# Altium PCB BreakoutPcb.PcbDoc
Units mm, origin at the board's own origin, x right, y up, seen from the top; angles counter-clockwise.
Board outline 40.78 x 37.52 mm, 2 copper layers (Top Layer, Bottom Layer); 11 components, 15 nets, 60 pads, 6 vias.
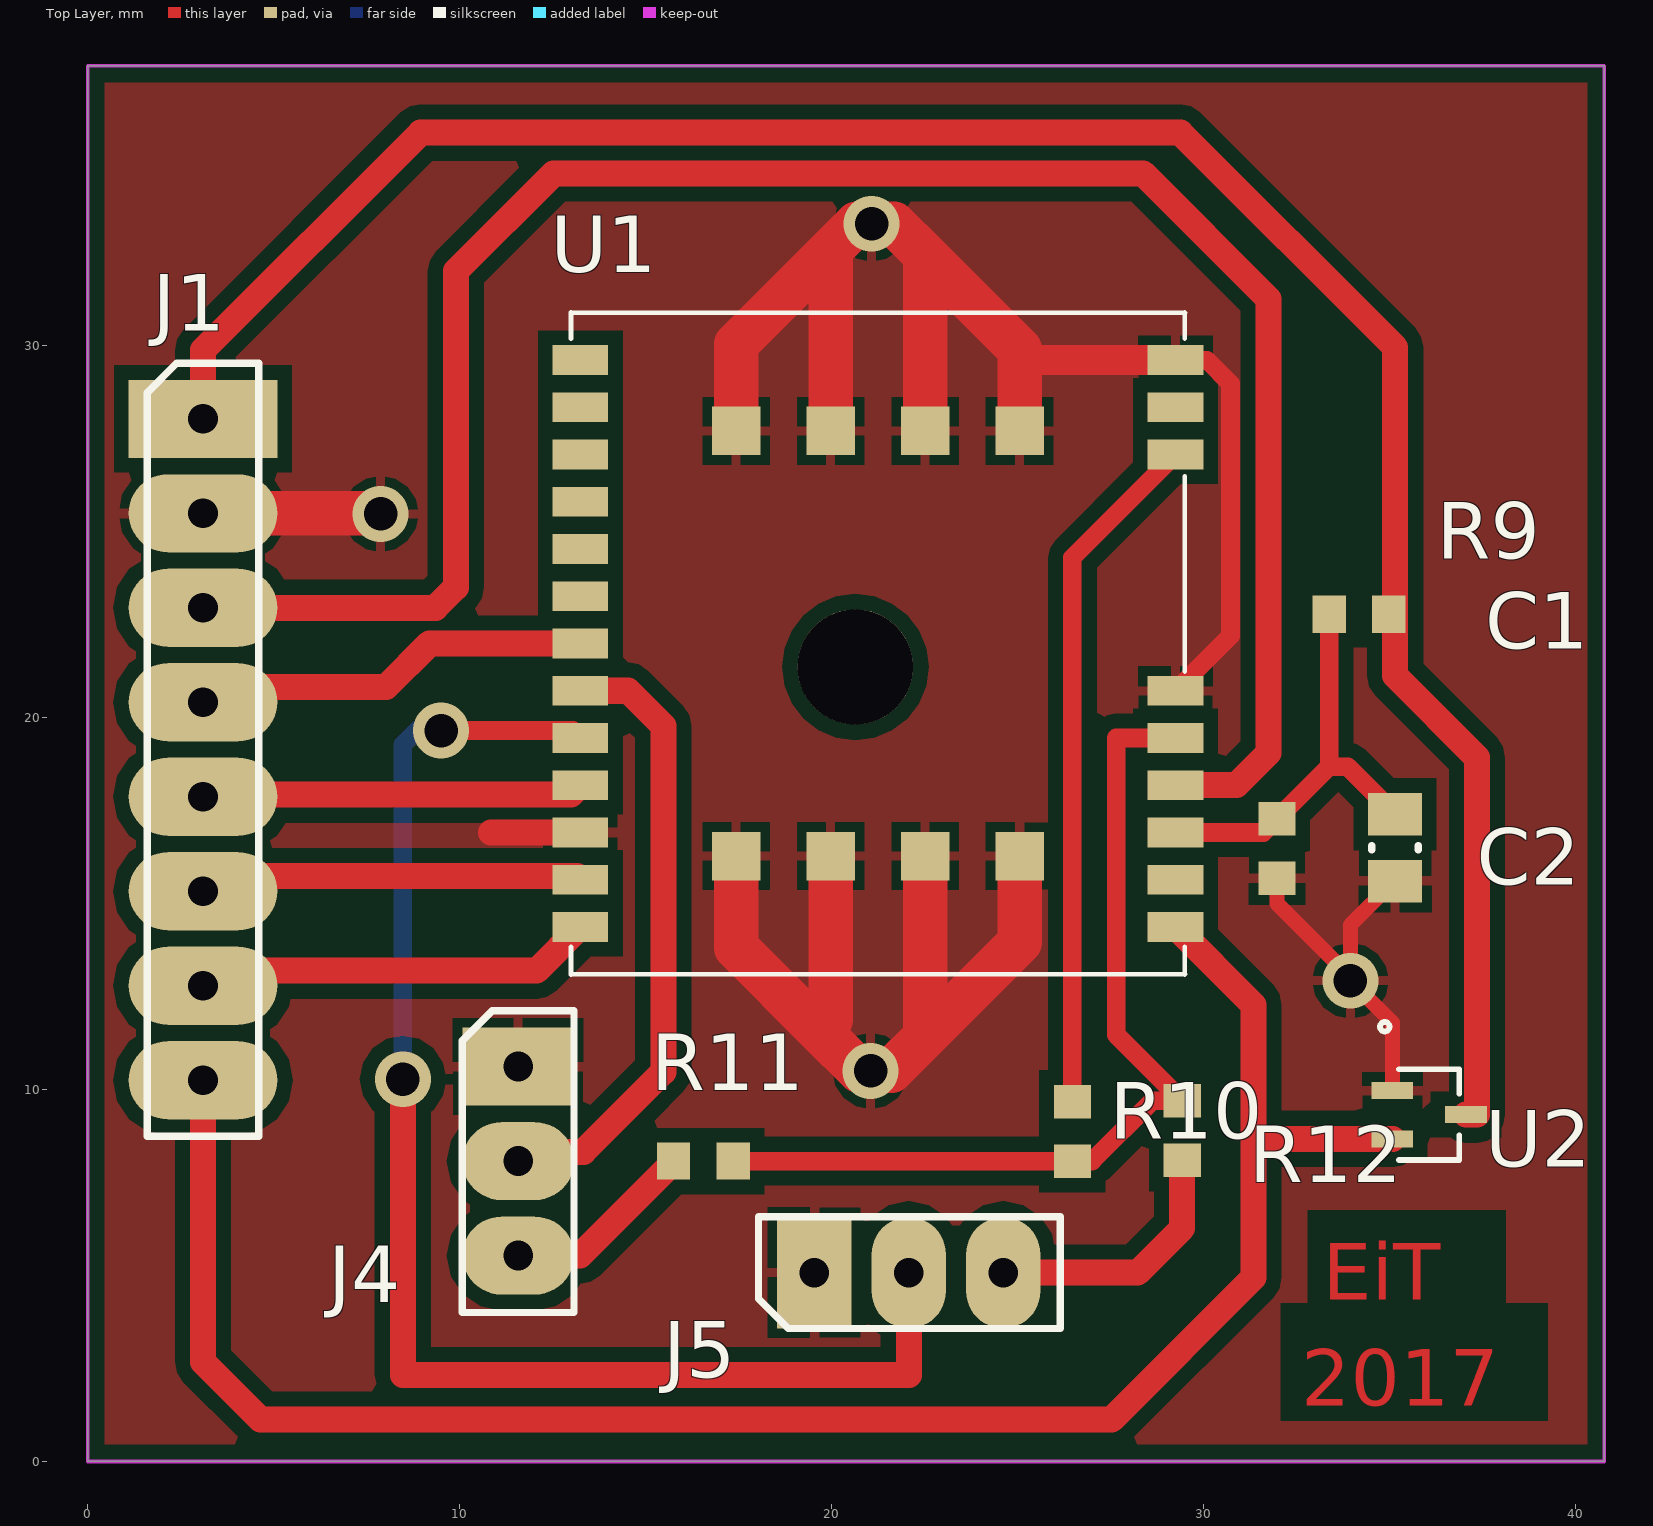
[diagram p0: Top Layer view]
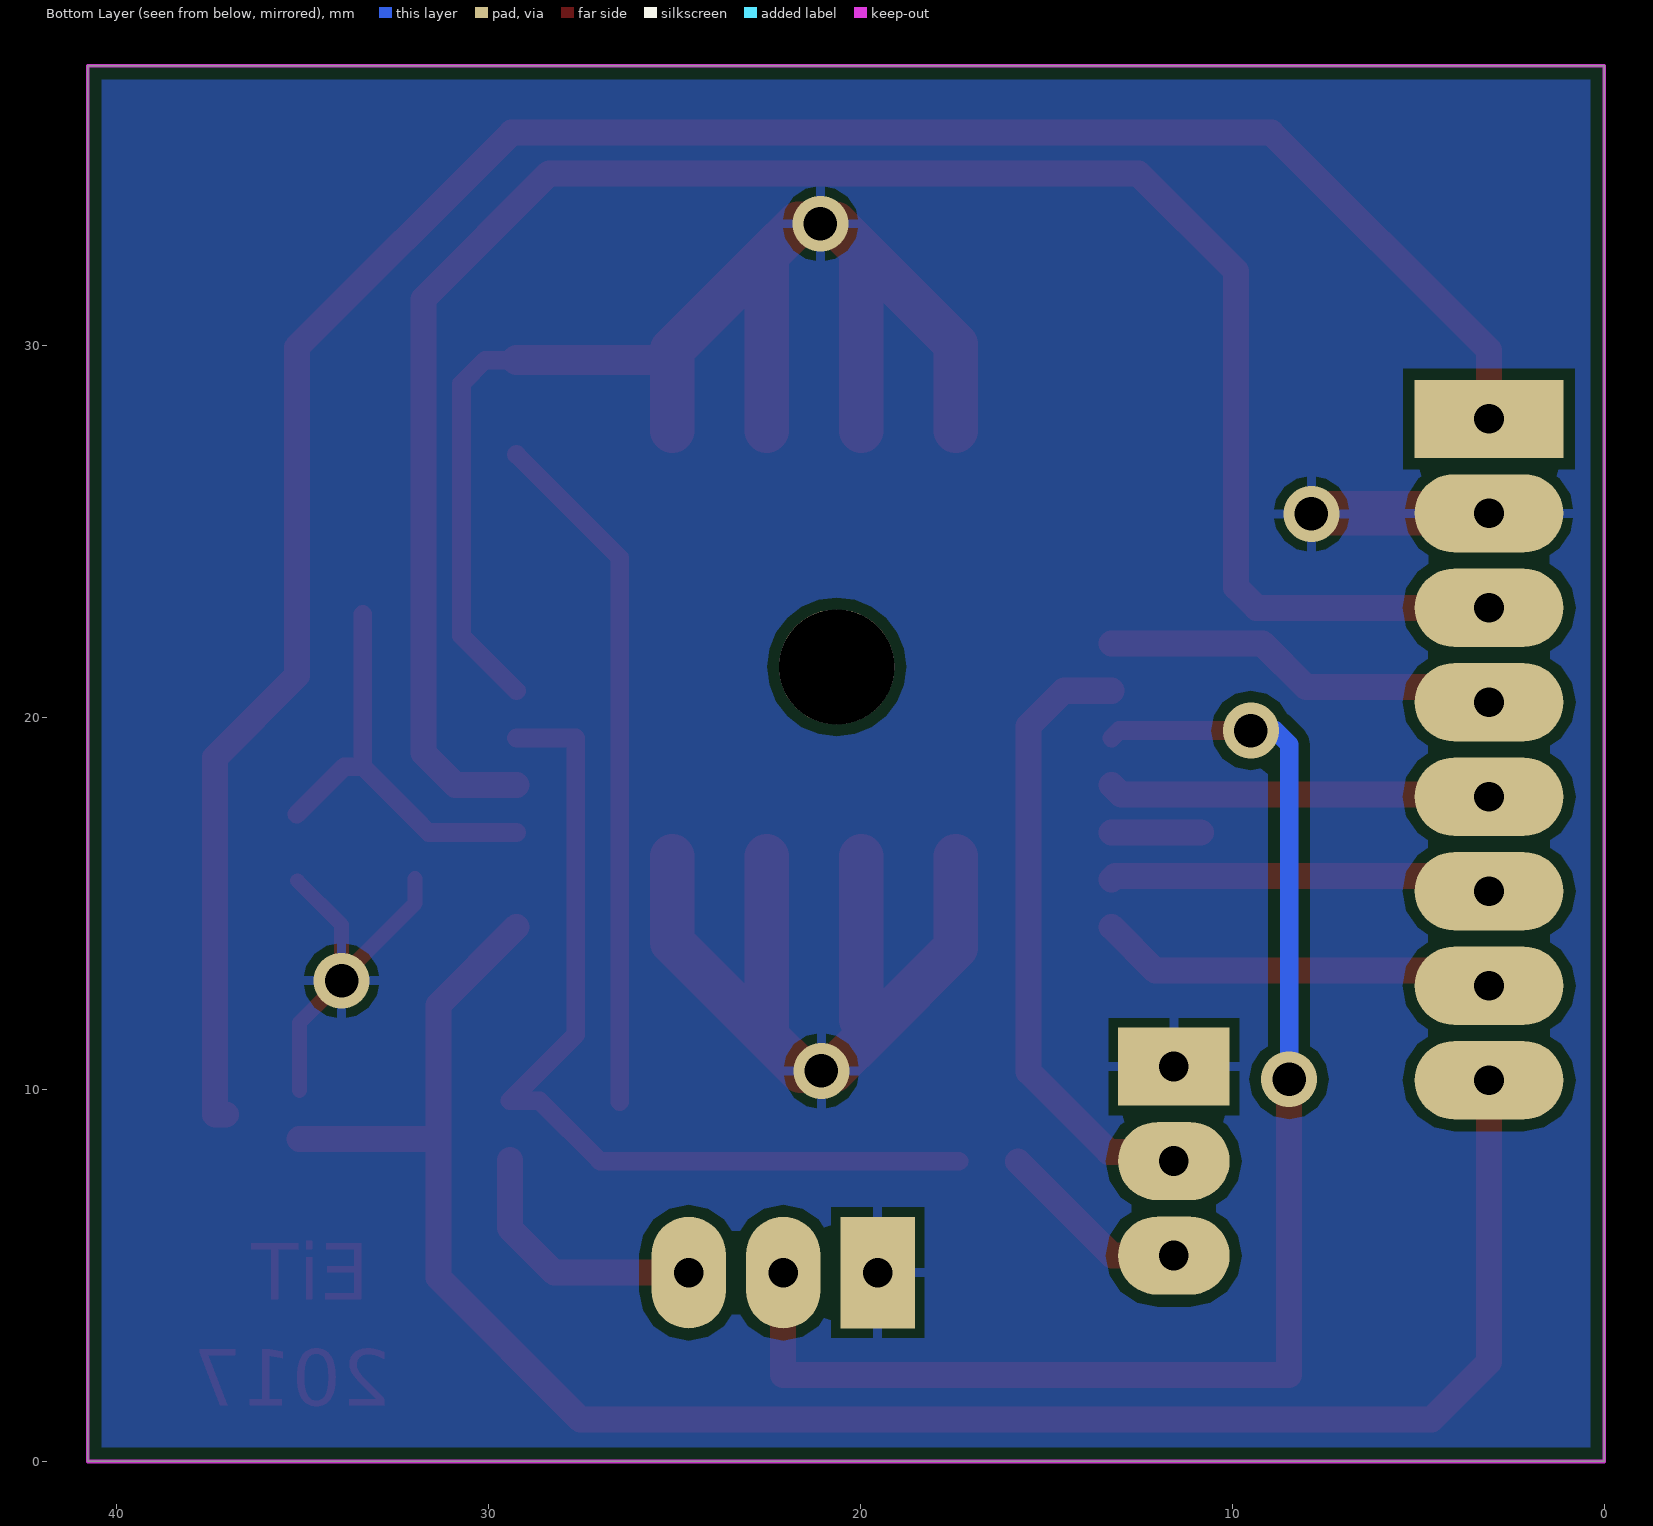
[diagram p1: Bottom Layer view, seen from below]

## Layer stack, top to bottom
Top Solder: solder mask 0.0102, Solder Resist, Dk 3.5
Top Layer: signal copper 0.0356
Dielectric 1: dielectric 0.32, FR-4, Dk 4.8
Bottom Layer: signal copper 0.0356
Bottom Solder: solder mask 0.0102, Solder Resist, Dk 3.5

## Board outline
0,37.275 0,37.525 40.775,37.525 40.775,0 0,0

## Design rules (kind name [scope] priority, off if disabled: settings)
Clearance Clearance_2 [InNamedPolygon('Bottom Layer-GND')] p1: gap=0.3
Clearance Clearance_1 [InNamedPolygon('Bottom Layer-GND')] p2: gap=0.4
Clearance Clearance_Text [IsText] p3: gap=0
Clearance Clearance_Poly [All vs InPolygon] p4: gap=0.4
Clearance [All] p5: gap=0.25
HoleSize [All] p1: absolutevalues=TRUE maxlimit=5 minlimit=0.025 maxpercent=80.000 minpercent=20.000
MinimumSolderMaskSliver [All] p1: minsoldermaskwidth=0.15
PolygonConnect [All] p1: connectstyle=Relief reliefconductorwidth=0.254 reliefentries=4 polygonreliefangle="90 Angle" airgapwidth=0.254
RoutingVias [All] p1: holewidth=0.711 width=1.27 viastyle="Through Hole" minholewidth=0.711 minwidth=1.27 maxholewidth=0.711 maxwidth=1.27
SilkToSilkClearance [All] p1: silktosilkclearance=0.01
SilkToSolderMaskClearance [IsPad] p1: minsilkscreentomaskgap=0.01 clearancetoexposedcopper=FALSE
SolderMaskExpansion [All] p1: expansion=0.102
Width [All] p1: maxlimit=2 minlimit=0.3 preferedwidth=0.4
26 further rules are at their usual default settings.

## Components (designator, comment, footprint, x,y, rotation, side; value= is the part's Value field where it differs from the comment)
C1 "100nF" CAPC0603(1608)55_N 31.975,16.475 r90 top
C2 "47nF" CAPC0805(2012)100_N 35.15,16.5 r90 top
J1 "Header1x8" HDRV8W64P254_1X8_2032X254X900B 3.1,19.14 r0 top
J4 "Header1x3" HDRV3W64P254_1X3_762X254X900B#1 11.575,8.075 r0 top
J5 "Header1x3" HDRV3W64P254_1X3_762X254X900B#2 22.075,5.075 r90 top
R9 "0R" RESC0603(1608)_N 34.175,22.775 r0 top
R10 "10k" RESC0603(1608)_N 26.475,8.875 r90 top
R11 "2k2" RESC0603(1608)_N 16.55,8.075 r0 top
R12 "2k2" RESC0603(1608)_N 29.425,8.9 r90 top
U1 "A2235-H" XCVR_A2235-H 21.245,21.99 r180 top
U2 "MAX809SEXR-T" 21-0075D 36.066,9.325 r270 top

## Footprints (in the part's own frame and the unit in brackets; to place one, negate y for a bottom-side part, rotate by r counter-clockwise, add the part's x,y. Pads: shape width x height; smd on the part's side, far side on the other; paste and mask are expansions set on the pad)
21-0075D [mil]
  rect 18x44 smd paste-1000 mask-1000: 1(-25.59,-39) 2(25.59,-39) 3(0,39)
  silkscreen extent -98,-52 48,32
CAPC0603(1608)55_N [mm] "Chip Capacitor, Body 1.6x0.8mm, Height 0.55mm, IPC Medium Density"
  rect 0.9x1 smd: 1(-0.8,0) 2(0.8,0)
  body extent -0.87,-0.48 0.88,0.47, height 0.55
CAPC0805(2012)100_N [mm] "Chip Capacitor, Body 2.0x1.2mm, Height 1.0mm, IPC Medium Density"
  rect 1.15x1.45 smd: 1(-0.9,0) 2(0.9,0)
  silkscreen extent -0.05,-0.63 0.05,0.63, body extent -1.1,-0.72 1.1,0.73, height 1
HDRV3W64P254_1X3_762X254X900B#1 [mm] "Header 1x3"
  rect 3x2.1 hole 0.8: 1(0,2.54)
  oval 3x2.1 hole 0.8: 2(0,0) 3(0,-2.54)
  silkscreen extent -1.5,-4.07 1.5,4.04
HDRV3W64P254_1X3_762X254X900B#2 [mm] "Header 1x3"
  rect 3x2 hole 0.8: 1(0,2.54)
  oval 3x2 hole 0.8: 2(0,0) 3(0,-2.54)
  silkscreen extent -1.5,-4.07 1.5,4.04
HDRV8W64P254_1X8_2032X254X900B [mm] "Header 1x8"
  rect 4x2.1 hole 0.8: 1(0,8.89)
  oval 4x2.1 hole 0.8: 2(0,6.35) 3(0,3.81) 4(0,1.27) 5(0,-1.27) 6(0,-3.81) 7(0,-6.35) 8(0,-8.89)
  silkscreen extent -1.5,-10.4 1.5,10.39
RESC0603(1608)_N [mm] "Chip Resistor, Body 1.6x0.8mm, IPC Medium Density"
  rect 0.9x1 smd: 1(-0.8,0) 2(0.8,0)
  body extent -0.85,-0.47 0.85,0.47, height 0.6
XCVR_A2235-H [mm]
  rect 1.5x0.8 smd paste-25.4 mask-25.4: 1(-8,7.62) 2(-8,6.35) 3(-8,5.08) 4(-8,3.81) 5(-8,2.54) 6(-8,1.27) 7(-8,-5.08) 8(-8,-6.35) 9(-8,-7.62) 10(8,-7.62) 11(8,-6.35) 12(8,-5.08) 13(8,-3.81) 14(8,-2.54) 15(8,-1.27) 16(8,0) 17(8,1.27) 18(8,2.54) 19(8,3.81) 20(8,5.08) 21(8,6.35) 22(8,7.62)
  rect 1.3x1.3 smd paste-25.4 mask-25.4: 23(-3.81,5.715) 24(-1.27,5.715) 25(1.27,5.715) 26(3.81,5.715) 27(-3.81,-5.715) 28(-1.27,-5.715) 29(1.27,-5.715) 30(3.81,-5.715)
  round 3.1 hole 3.1 unplated: None(0.605,0.63)
  silkscreen extent -8.25,-8.9 8.26,8.9

## Part data
C1: library part 3028, "X7R 50V 5%"
C2: library part 2446, "X7R"
J1: library part 2435
J4 J5: library part 2430
R9: library part 3186, "0.1W 1% Thick film resistor"
R10: library part 2444, "0.1W 1% Thick film resistor"
R11 R12: library part 3449, "0.1W 1% Thick film resistor"
U1: "Gps Module, Mini Outline w/ Ant"
U2: "PMIC - system monitor Maxim Integrated MAX809SEXR+T Reset/power-on reset SC 70 3"

## Via types
v1: diameter 1.5, hole 0.9, Top Layer to Bottom Layer, 6 vias

## Nets (pads, with @x,y where several pads share a name; then routed paths per layer and width w, separated by ;. In a path a pad name is that pad's centre, name@x,y a point inside that pad or via, vN(x,y) a via of type N, cw(c..) or ccw(c..) an arc to the next point about the centre after c; other vN are vias at no path point)
3V3: J1.1 R9.2 U2.3 | length 60.5
  Top Layer w0.7: J1.1 3.1,29.875 8.95,35.725 29.375,35.725 35.15,29.95 35.15,21.125 37.35,18.925 37.35,9.325 U2.3
GND: C1.1 C2.1 J1.2 J4.1 J5.1 U1.6 U1.9 U1.20 U1.23 U1.24 U1.25 U1.26 U1.27 U1.28 U1.29 U1.30 U2.1 | length 81.5
  Top Layer w0.4: C1.1 31.975,15 v1@33.95,13.025 ; U2.1 35.075,11.8 v1(33.95,12.925) v1@33.95,13.025 ; C2.1@35.138,15.613 33.95,14.425 v1@33.95,13.025
  Top Layer w0.5: U1.6 30.725,22.2 30.725,28.975 30.09,29.61 U1.9
  Top Layer w0.7: 10.84,16.91 U1.20
  Top Layer w0.8: 25.055,29.895 25.34,29.61 U1.9
  Top Layer w1.2: J1.2 7.86,25.49 v1(7.875,25.475) ; U1.26 17.435,13.815 19.675,11.575 ; U1.30 17.435,30.035 19.925,32.525 ; U1.25 19.975,11.875 19.675,11.575 ; U1.29 19.975,32.475 19.925,32.525 ; U1.24 22.515,11.415 ; U1.28 22.515,32.415 22.525,32.425 ; U1.23 25.055,13.955 22.515,11.415 ; U1.27 25.055,29.895 22.525,32.425 ; 19.675,11.575 20.75,10.5 v1(21.05,10.5) 21.6,10.5 22.515,11.415 ; 19.925,32.525 20.675,33.275 v1(21.075,33.275) 21.675,33.275 22.525,32.425
NetC1_2: C1.2 C2.2 R9.1 U1.3 | length 11.3
  Top Layer w0.5: U1.3 31.61,16.91 C1.2 33.375,18.675 ; R9.1 33.375,18.675 ; C2.2 33.875,18.675 33.375,18.675
NetJ1_3: J1.3 U1.4 | length 54.9
  Top Layer w0.7: J1.3 9.35,22.95 9.9,23.5 9.9,32 12.525,34.625 28.375,34.625 31.75,31.25 31.75,19.05 30.88,18.18 U1.4
NetJ1_4: J1.4 U1.16 | length 10.6
  Top Layer w0.7: J1.4@3.1,20.815 8.015,20.815 9.19,21.99 U1.16
NetJ1_5: J1.5 U1.19 | length 10.4
  Top Layer w0.7: J1.5@3.1,18.275 3.45,17.925 12.99,17.925 U1.19
NetJ1_6: J1.6 U1.21 | length 10.4
  Top Layer w0.7: J1.6 3.505,15.735 13.15,15.735 U1.21
NetJ1_7: J1.7 U1.22 | length 10.8
  Top Layer w0.7: J1.7 3.505,13.195 12.07,13.195 U1.22
NetJ1_8: J1.8 U1.1 U2.2 | length 52.1
  Top Layer w0.7: J1.8 3.1,2.675 4.65,1.125 27.525,1.125 31.34,4.94 31.34,8.675 31.34,12.275 U1.1 ; 31.34,8.675 U2.2
NetJ4_2: J4.2 U1.17 | length 16.8
  Top Layer w0.7: J4.2 11.825,8.325 13.325,8.325 15.475,10.475 15.475,19.775 14.53,20.72 U1.17
NetJ4_3: J4.3 R11.1 | length 5.2
  Top Layer w0.7: J4.3 13.235,5.535 R11.1@15.763,8.063
NetJ5_2: J5.2 U1.18 | length 38.3
  Top Layer w0.5: v1(9.5,19.65) 13.045,19.65 U1.18
  Top Layer w0.7: v1(8.475,10.275) 8.475,2.325 22.075,2.325 J5.2
  Bottom Layer w0.5: v1(8.475,10.275) 8.475,19.275 8.85,19.65 v1(9.5,19.65)
NetJ5_3: J5.3 R12.1 | length 7.1
  Top Layer w0.7: J5.3 28.225,5.075 29.425,6.275 R12.1
NetR10_1: R10.1 R11.2 R12.2 U1.5 | length 24.8
  Top Layer w0.5: R11.2 27,8.075 28.625,9.7 R12.2 27.65,11.475 27.65,19.45 U1.5
NetR10_2: R10.2 U1.7 | length 18.5
  Top Layer w0.5: R10.2 26.475,24.3 U1.7
pads on no net: U1.2 U1.8 U1.10 U1.11 U1.12 U1.13 U1.14 U1.15 U1.None

## Polygon pours and split planes (outlines as drawn)
GND on Bottom Layer "Bottom Layer-GND" (solid, remove dead copper, pour order 6): -0.525,-4.725 49.475,-4.725 49.475,45.275 -0.525,45.275 -0.525,-4.725
GND on Top Layer "Toplayer-GND" (solid, remove dead copper, pour order 8): -0.525,-4.725 49.475,-4.725 49.475,45.275 -0.525,45.275 -0.525,-4.725

## Keep-outs
Keep-Out Layer:
  the board outline again, w0.1

## Other copper
Top Layer:
  text "EiT" at 33.2,4.35 h1.52
  text "2017" at 32.625,1.5 h1.52